# Altium PCB MOBO_Rev2.PcbDoc (part 2 of 2)
Units mil, origin at the board's own origin, x right, y up, seen from the top; angles counter-clockwise.
Board outline 3000 x 2999.58 mil, 4 copper layers (Top Layer, Layer 1, Layer 2, Bottom Layer), stack 23.756 mil thick; 114 components, 91 nets, 741 pads, 25 vias.
Unrouted connection lines stored in the file: 474.
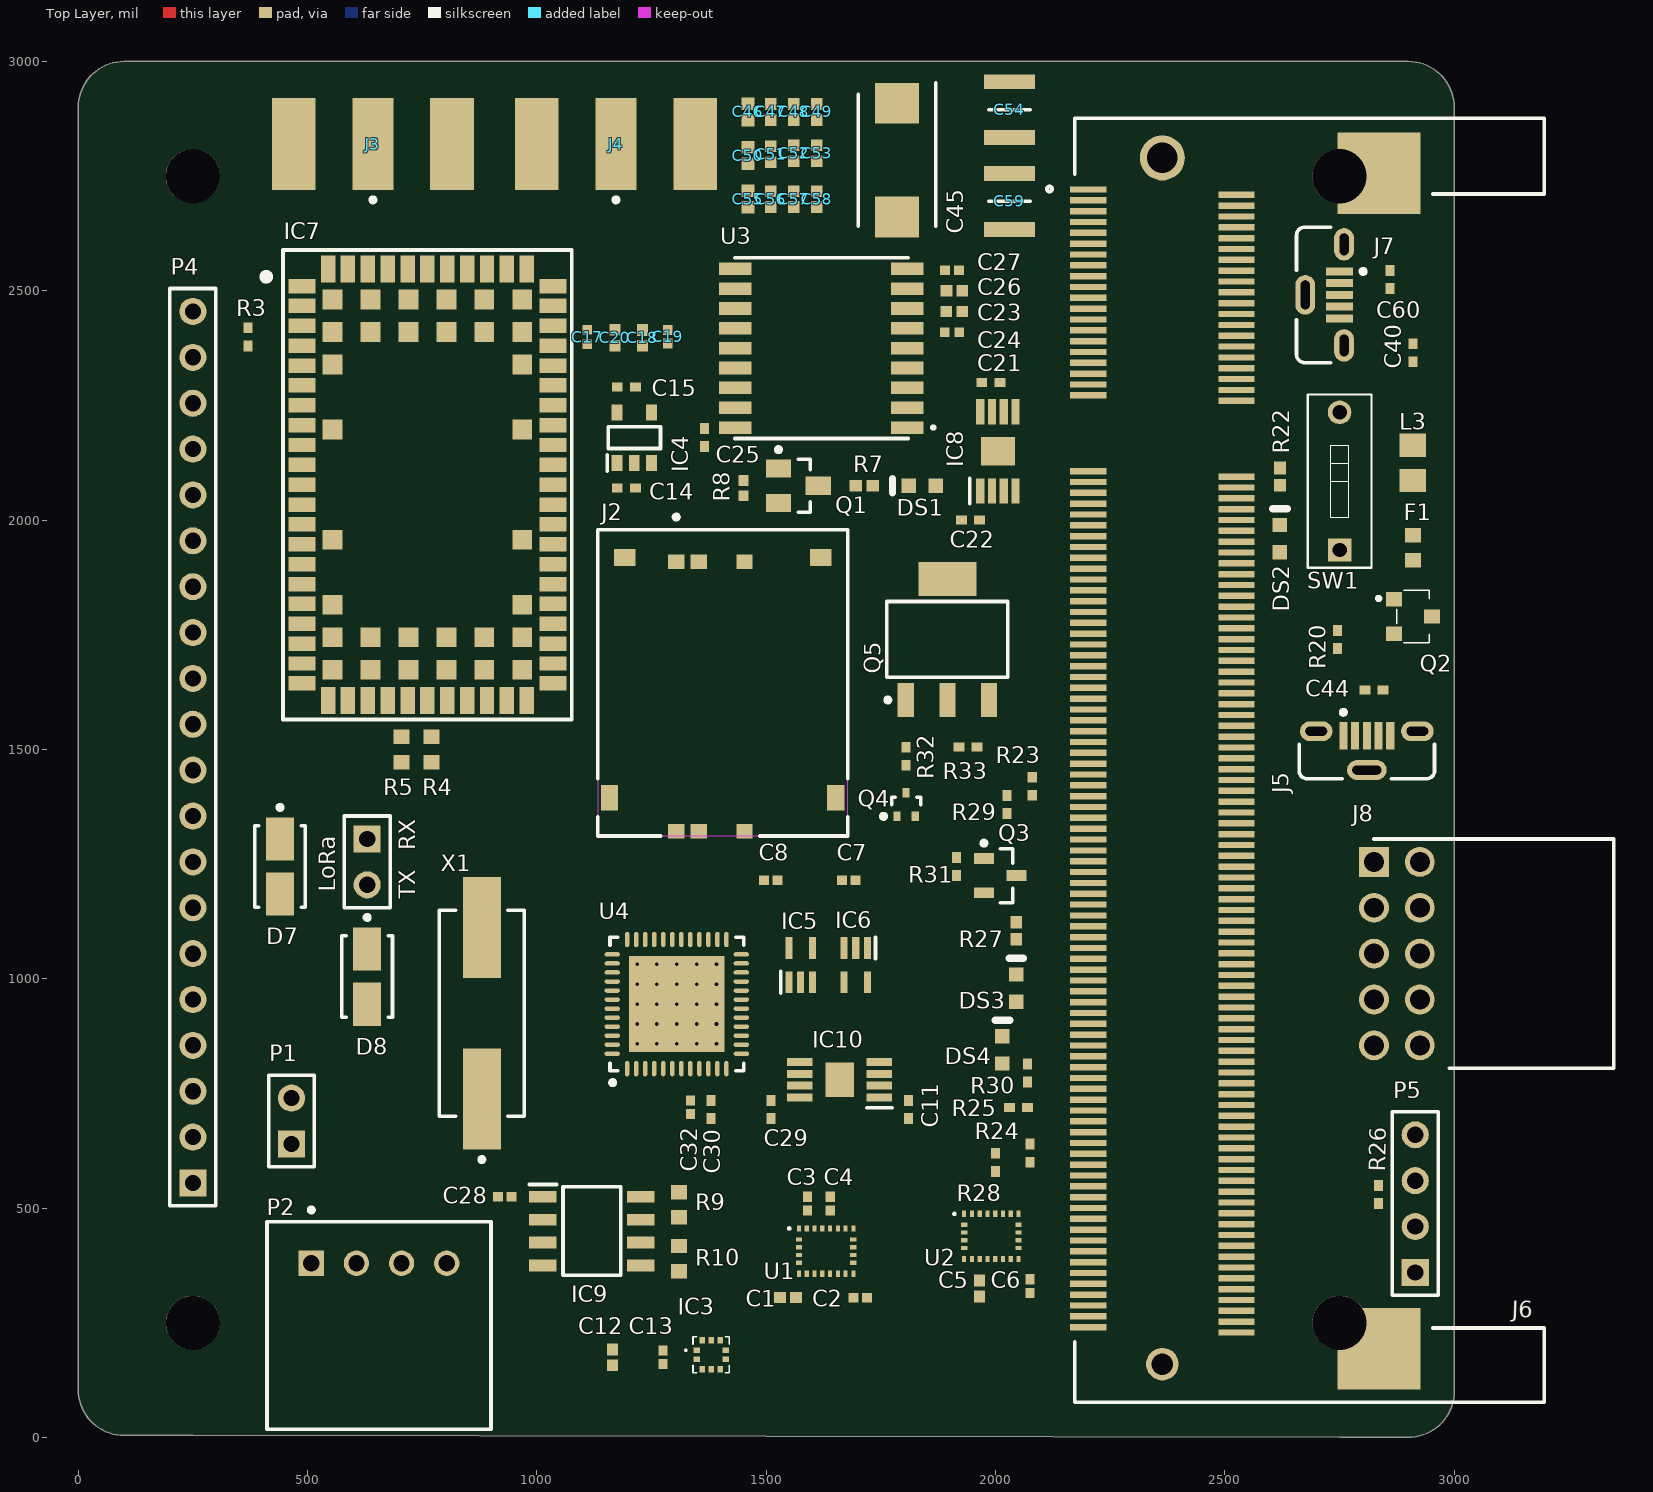
[diagram p0: Top Layer view]

## Via types
v1: diameter 19.68, hole 7.87, Top Layer to Bottom Layer, 25 vias

## Nets (pads, with @x,y where several pads share a name; then routed paths per layer and width w, separated by ;. In a path a pad name is that pad's centre, name@x,y a point inside that pad or via, vN(x,y) a via of type N, cw(c..) or ccw(c..) an arc to the next point about the centre after c; other vN are vias at no path point) (continued)
+3.8_SARA: C15.2 C16.1 C17.2 C18.2 C19.2 C20.2 IC4.5 IC7.51 IC7.52 IC7.53
+5: C11.2 C14.2 IC4.1 IC10.1
A1: IC9.8 P2.1 R9.1
B1: IC9.7 P2.2 R9.2
C1: C3.2 C7.2 U1.24 U2.24
CAP1: C4.2 C8.2 U1.21 U2.21
CGND: D1.2 D2.2 D3.2 D4.2 D7.2 D8.2 J5.6 J5.7 J5.8 J7.6 J7.7 J7.8
CHIP_SELECT: J6.58 U4.5
GMS_ANT: IC7.56 J3.1
GND: C1.1 C2.1 C3.1 C4.1 C5.1 C6.1 C7.1 C8.1 C11.1 C12.1 C13.1 C14.1 C15.1 C16.2 C17.1 C18.1 C19.1 C20.1 C21.1 C22.1 C23.2 C24.2 C25.1 C26.1 C27.1 C28.1 C29.1 C30.1 C32.1 C40.1 C41.1 C42.1 C43.1 C44.1 C45.2 C46.1 C47.2 C48.2 C49.2 C50.1 C51.2 C52.2 C53.2 C54.2 C55.1 C56.2 C57.2 C58.2 C59.2 C60.2 DS4.2 IC3.5 IC3.8 IC3.9 IC4.2 IC5.3 IC6.3 IC7.1 IC7.3 IC7.5 IC7.14 IC7.20 IC7.21 IC7.22 IC7.30 IC7.32 IC7.43 IC7.50 IC7.54 IC7.55 IC7.57 IC7.58 IC7.59 IC7.60 IC7.61 IC7.63 IC7.64 IC7.65 IC7.66 IC7.67 IC7.68 IC7.69 IC7.70 IC7.71 IC7.72 IC7.73 IC7.74 IC7.75 IC7.76 IC7.77 IC7.78 IC7.79 IC7.80 IC7.81 IC7.82 IC7.83 IC7.84 IC7.85 IC7.86 IC7.87 IC7.88 IC7.89 IC7.90 IC7.91 IC7.92 IC7.93 IC7.94 IC7.95 IC7.96 IC8.4 IC8.5 IC8.6 IC8.9 IC9.4 IC10.4 IC10.5 IC10.6 IC10.9 IC11.2 IC11.9 J2.C5 J3.2 J3.3 J3.4 J3.5 J4.2 J4.3 J4.4 J4.5 J5.5 J6.1 J6.7 J6.8 J6.13 J6.14 J6.19 J6.20 J6.25 J6.26 J6.31 J6.32 J6.37 J6.38 J6.43 J6.44 J6.49 J6.50 J6.55 J6.56 J6.61 J6.62 J6.67 J6.68 J6.73 J6.74 J6.79 J6.80 J6.85 J6.86 J6.91 J6.92 J6.97 J6.98 J6.103 J6.104 J6.109 J6.110 J6.115 J6.116 J6.121 J6.122 J6.127 J6.133 J6.134 J6.139 J6.140 J6.145 J6.146 J6.151 J6.152 J6.157 J6.163 J6.164 J6.169 J6.170 J6.181 J6.182 J6.187 J6.188 J6.195 J6.196 J7.5 J8.4 P4.1 P4.12 P4.15 P4.18 P5.3 Q1.2 Q3.2 Q4.2 R8.2 R22.1 R23.2 R24.2 R28.2 R29.2 SW1.2 U1.14 U1.15 U1.16 U1.17 U1.18 U1.19 U1.20 U2.14 U2.15 U2.16 U2.17 U2.18 U2.19 U2.20 U3.1 U3.10 U3.12 U4.10 U4.46 U4.49
  other v1: 1218.39,858.39 1261.69,858.39 1305,858.39 1348.31,858.39 1391.61,858.39 1218.39,901.69 1261.69,901.69 1305,901.69 1348.31,901.69 1391.61,901.69 1218.39,945 1261.69,945 1305,945 1348.31,945 1391.61,945 1218.39,988.31 1261.69,988.31 1305,988.31 1348.31,988.31 1391.61,988.31 1218.39,1031.61 1261.69,1031.61 1305,1031.61 1348.31,1031.61 1391.61,1031.61
GPIO13: J6.47
GPS_ANT: J4.1 U3.11
GPS_RX_3.3: J6.53 P4.16
GPS_SCL: IC7.27 R4.1 U3.17
GPS_SDA: IC7.26 R5.1 U3.16
GPS_TX_3.3: J6.51 P4.17
MIC_P: IC7.49
MISO: J6.60 J8.6 U4.3
MOSI: J6.64 J8.8 U4.6
NetC43_2: C43.2 IC11.3
NetC60_1: C60.1 J7.1 Q5.2 Q5.4
NetDS1_2: DS1.2 R7.2
NetDS2_2: DS2.2 R22.2
NetDS3_2: DS3.2 R27.2
NetDS4_1: DS4.1 R30.2
NetJ6_28: J6.28 R28.1
NetJ6_30: J6.30 R24.1
NetJ6_82: J6.82 R29.1
NetJ6_84: J6.84 R23.1
NetJ6_90: J6.90 Q3.1 R31.1
NetQ1_3: Q1.3 R7.1
NetQ2_1: Q2.1 R20.1 SW1.1
NetQ3_3: Q3.3 R27.1
PWR_ON: IC7.15 R3.2
Q1GATE: Q5.1 R32.2 R33.1
Q3DRAIN: Q4.3 R32.1
RX2_LoRa: D7.1 LoRa.1 U4.33
RX_CB: IC9.2 U4.41
RX_CELL: IC6.4 U4.17
RX_CELL_1.8: IC6.2 IC7.12
RX_CELL_AUX: IC7.29 P1.1
RX_GPS: U3.2 U4.25
SCL: IC3.2 J6.5 P4.19 P5.2 R26.2 U1.2 U2.2
SCLK: J6.66 J8.10 U4.4
SDA: IC3.4 J6.3 P4.20 P5.1 R25.2 U1.4 U2.4
SIM_CLK: D2.1 IC7.38 J2.C3
SIM_IO: D4.1 IC7.39 J2.C7
SIM_RST: D3.1 IC7.40 J2.C2
TC1_GPIO18: J6.63 J8.1
TC2_GPIO19: J6.65 J8.3
TC3_GPIO24: J6.81 J8.5
TC4_GPIO26: J6.87 J8.7
TC5_GPIO9: J6.29 J8.9
TIMEPULSE: Q1.1 R8.1 U3.5
TOG1: J6.9 P4.2
TOG2: J6.11 P4.3
TOG3: J6.15 P4.4
TOG4: J6.17 P4.5
TOG5: J6.21 P4.6
TOG6: J6.23 P4.7
TOG7: J6.27 P4.8
TOG8: J6.78 P4.9
TOG9: J6.76 P4.10
TOG10: J6.72 P4.11
TX2_LoRa: D8.1 LoRa.2 U4.34
TX_CB: IC9.3 U4.42
TX_CELL: IC5.2 U4.18
TX_CELL_1.8: IC5.4 IC7.13
TX_CELL_AUX: IC7.28 P1.2
TX_GPS: U3.3 U4.26
USB_DM: J6.167 J7.2
USB_DP: J6.165 J7.3
V_BCKP: IC7.2 R3.1
VSIM: D1.1 IC7.41 J2.C1
XIN: U4.45 X1.1
XOUT: U4.44 X1.2
Y1: IC9.5 P2.4 R10.1
Z1: IC9.6 P2.3 R10.2
pads on no net: IC3.3 IC3.7 IC4.4 IC7.6 IC7.7 IC7.8 IC7.9 IC7.10 IC7.11 IC7.16 IC7.17 IC7.18 IC7.19 IC7.23 IC7.24 IC7.25 IC7.31 IC7.33 IC7.34 IC7.35 IC7.36 IC7.37 IC7.42 IC7.44 IC7.45 IC7.46 IC7.47 IC7.48 IC7.62 IC8.3 IC8.7 IC10.3 IC10.7 IC11.6 J2.C6 J2.S1 J2.S2 J2.S3 J2.S4 J5.2 J5.3 J5.4 J6.2 J6.4 J6.6 J6.10 J6.12 J6.16 J6.18 J6.22 J6.24 J6.33 J6.34 J6.35 J6.36 J6.45 J6.46 J6.52 J6.54 J6.69 J6.70 J6.71 J6.75 J6.77 J6.83 J6.88 J6.89 J6.93 J6.94 J6.95 J6.96 J6.99 J6.100 J6.101 J6.102 J6.105 J6.106 J6.107 J6.108 J6.111 J6.112 J6.113 J6.114 J6.117 J6.118 J6.119 J6.120 J6.123 J6.124 J6.125 J6.126 J6.128 J6.129 J6.130 J6.131 J6.132 J6.135 J6.136 J6.137 J6.138 J6.141 J6.142 J6.143 J6.144 J6.147 J6.148 J6.149 J6.150 J6.153 J6.154 J6.155 J6.156 J6.158 J6.159 J6.160 J6.161 J6.162 J6.166 J6.168 J6.171 J6.172 J6.173 J6.174 J6.175 J6.176 J6.177 J6.178 J6.179 J6.180 J6.201 J6.202 J6.203 J6.204 J7.4 U1.9 U1.10 U1.11 U1.12 U2.9 U2.10 U2.11 U2.12 U3.4 U3.13 U3.14 U3.15 U4.7 U4.11 U4.12 U4.13 U4.14 U4.15 U4.16 U4.19 U4.20 U4.21 U4.22 U4.23 U4.24 U4.27 U4.28 U4.29 U4.30 U4.31 U4.32 U4.35 U4.36 U4.37 U4.38 U4.39 U4.40 U4.48

## Silkscreen, mask and mechanical layers (free items; w line width, h text height)
Top Overlay:
  text "RX" at 735,1280 h36 r90
  text "TX" at 735,1175 h36 r90